# Altium PCB floppy_m0dule.PcbDoc
Units mil, origin at the board's own origin, x right, y up, seen from the top; angles counter-clockwise.
Board outline 1975 x 1975 mil, 2 copper layers (Top Layer, Bottom Layer); 42 components, 45 nets, 204 pads, 22 vias.
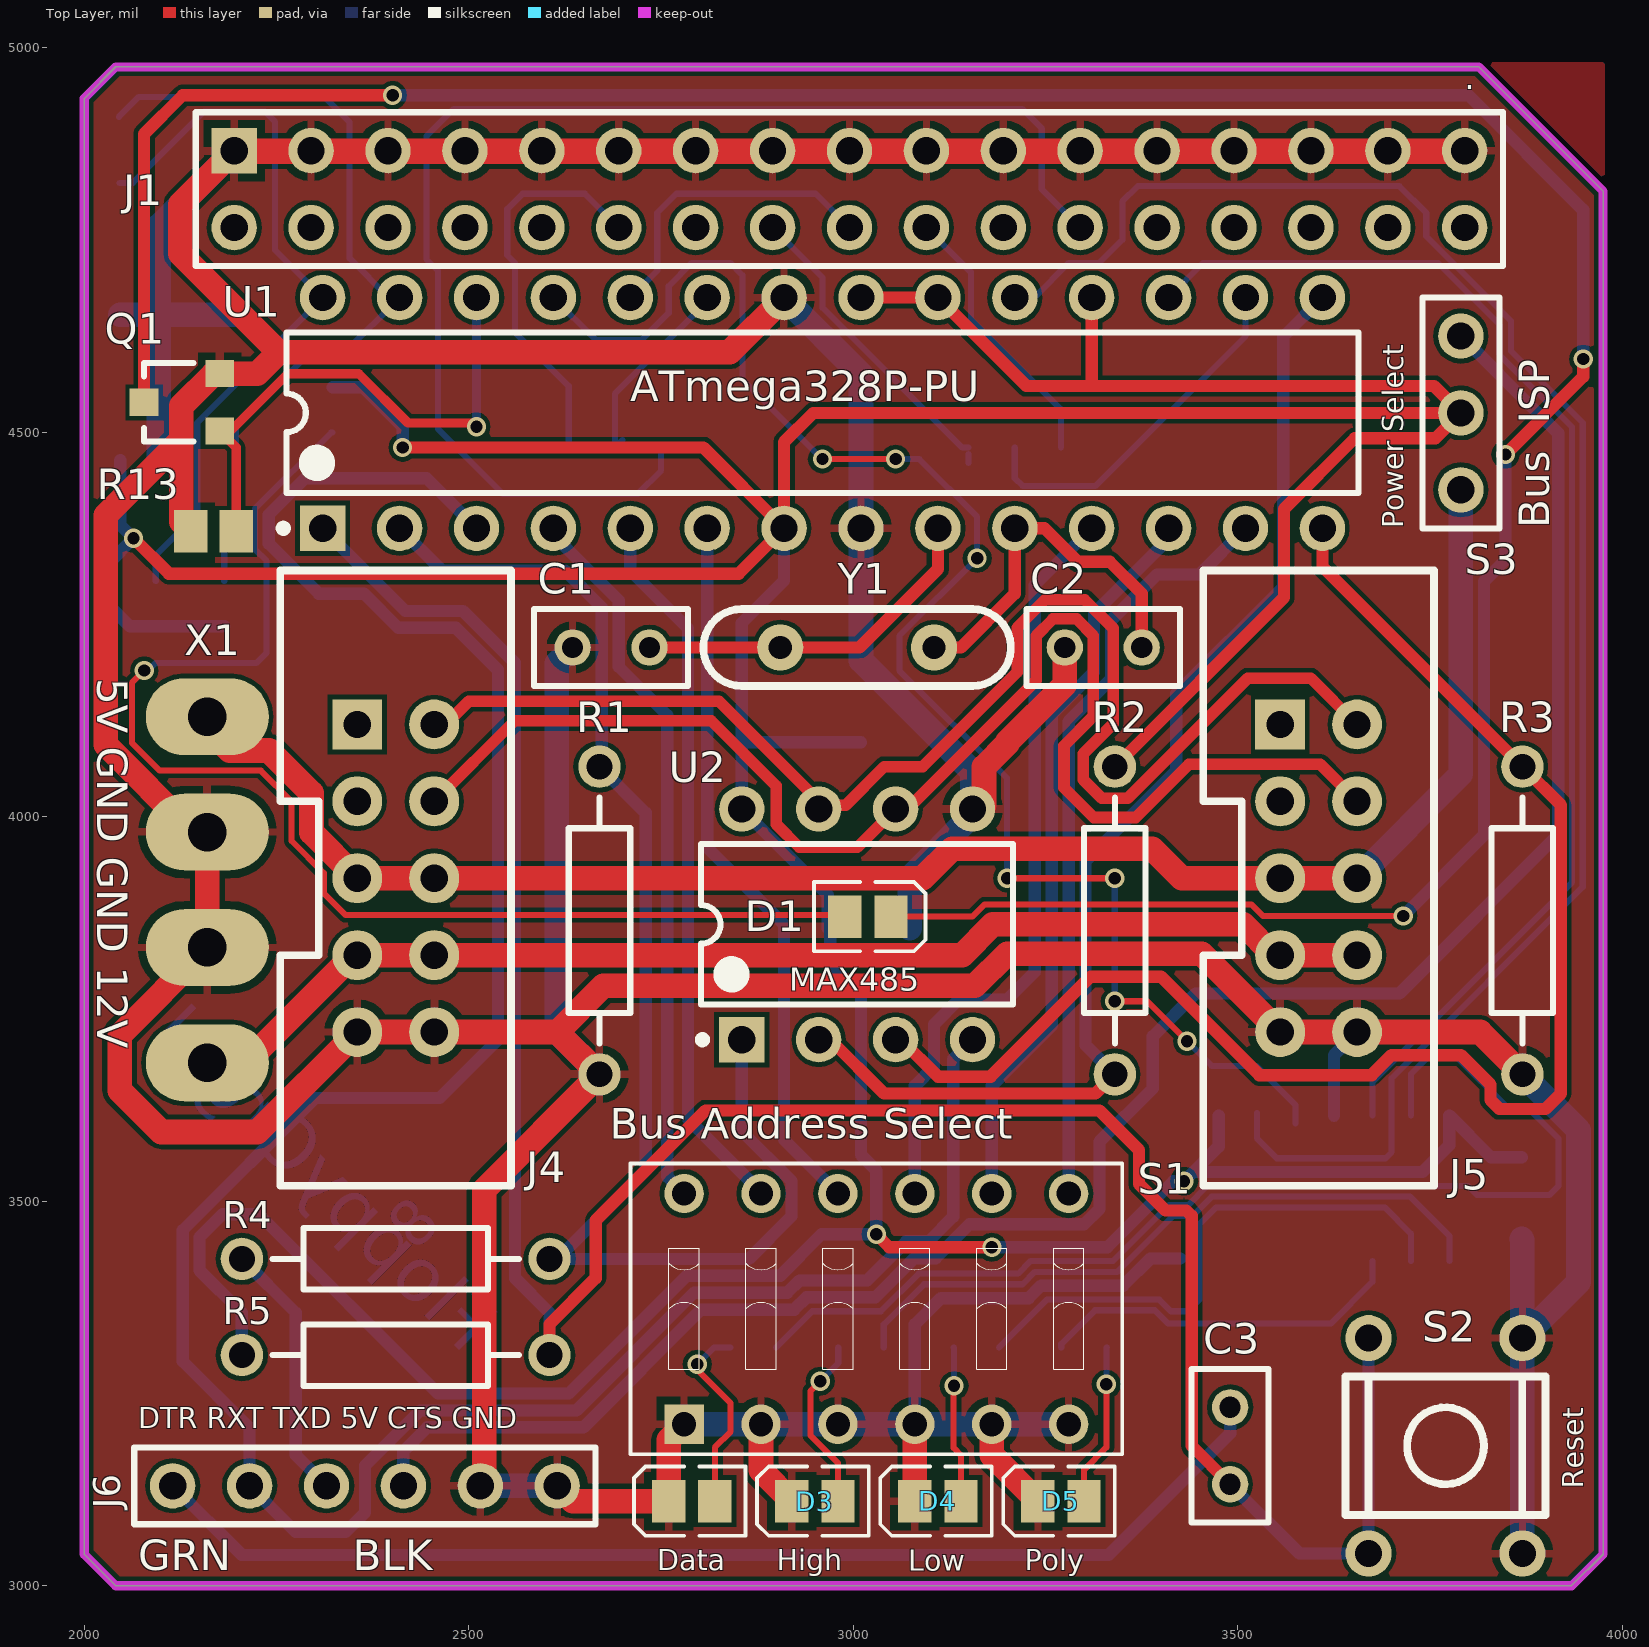
[diagram p0: Top Layer view]
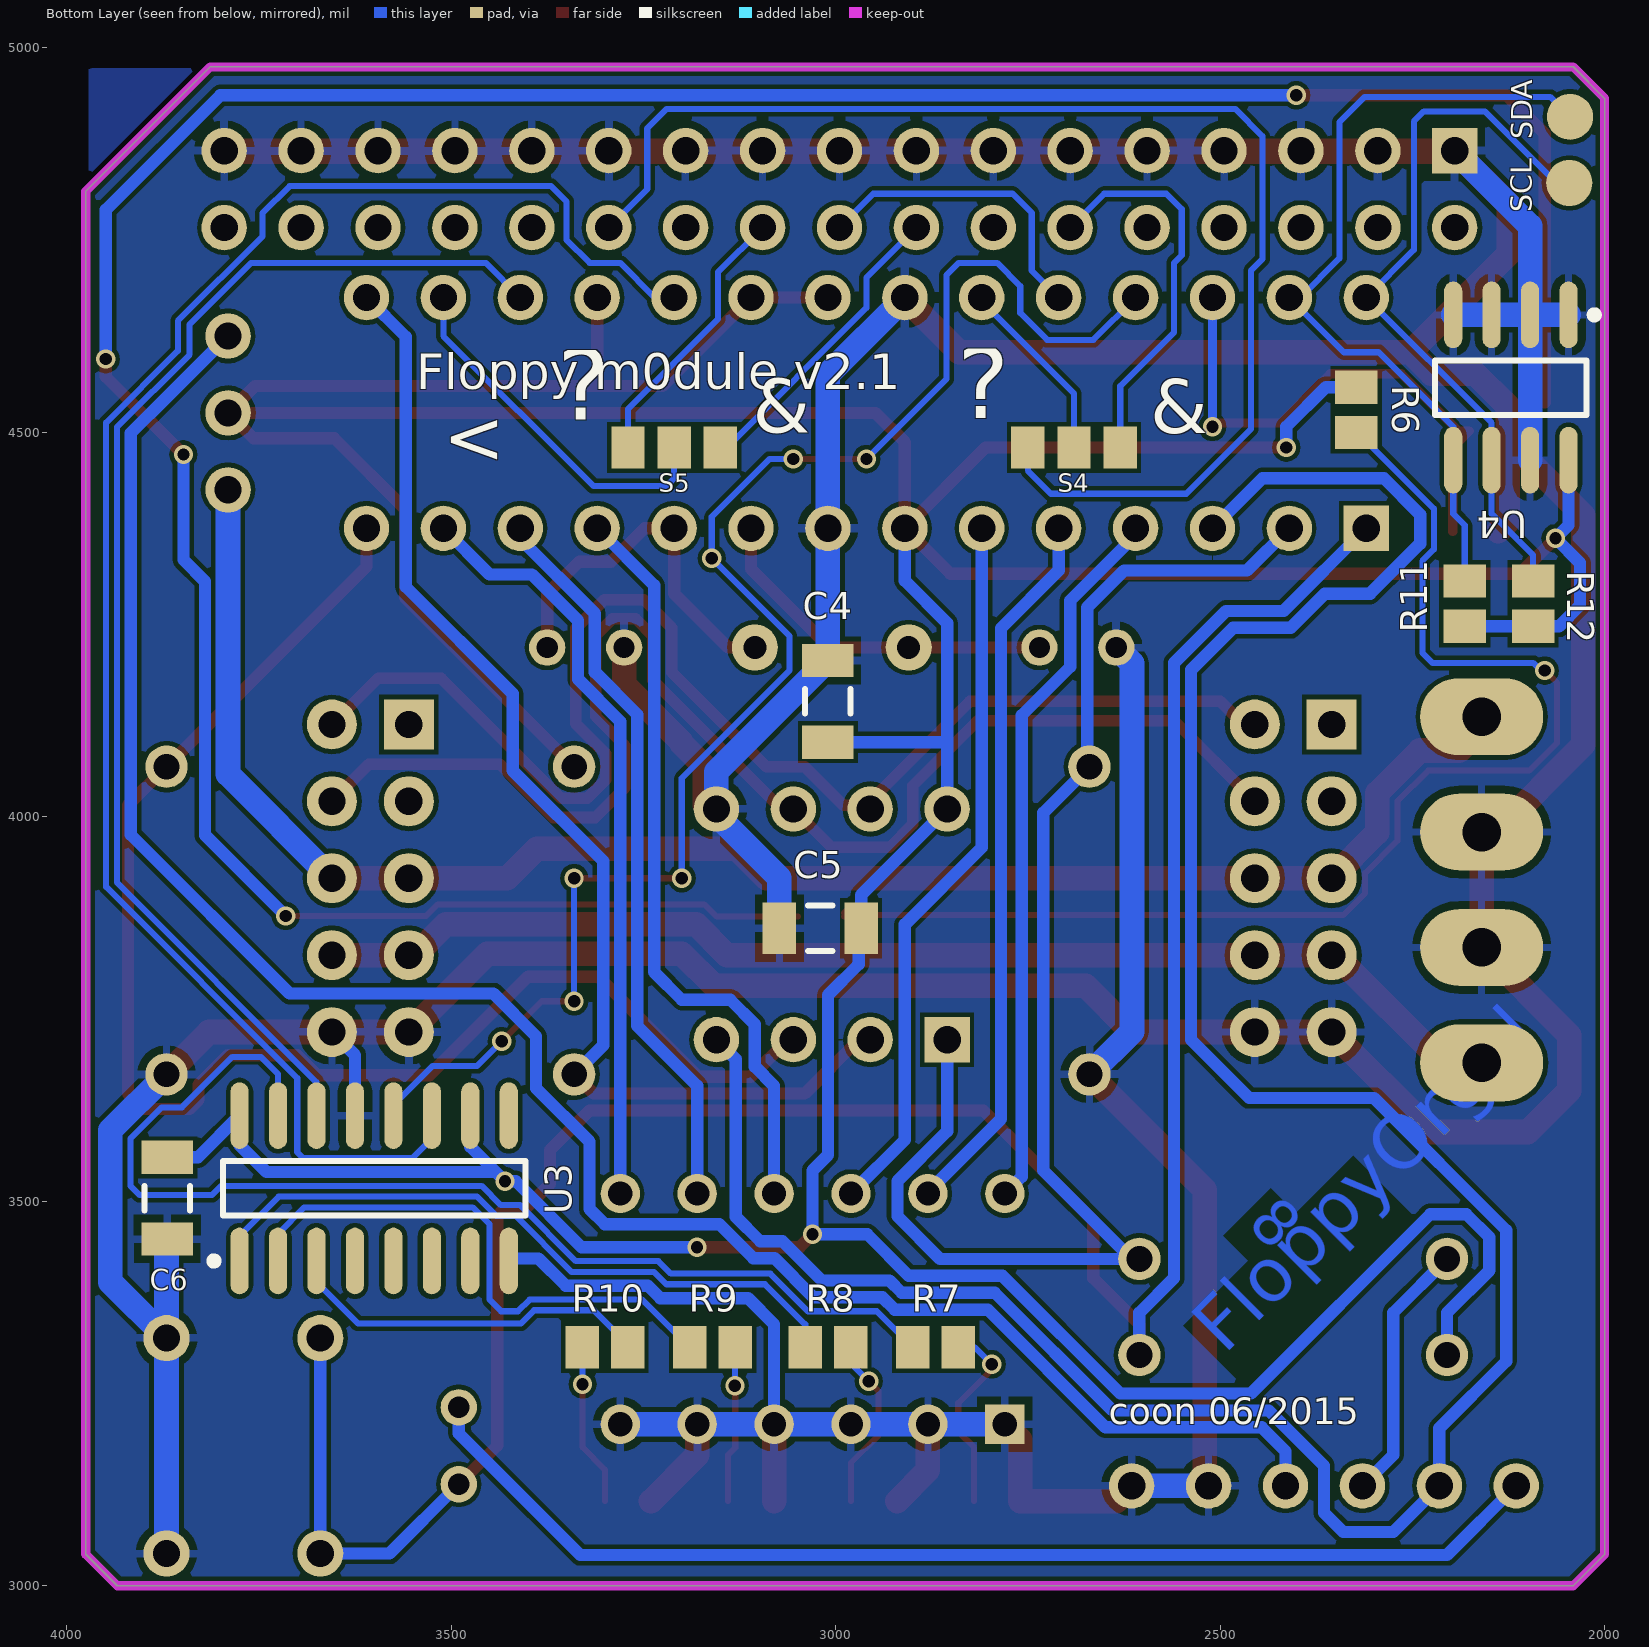
[diagram p1: Bottom Layer view, seen from below]
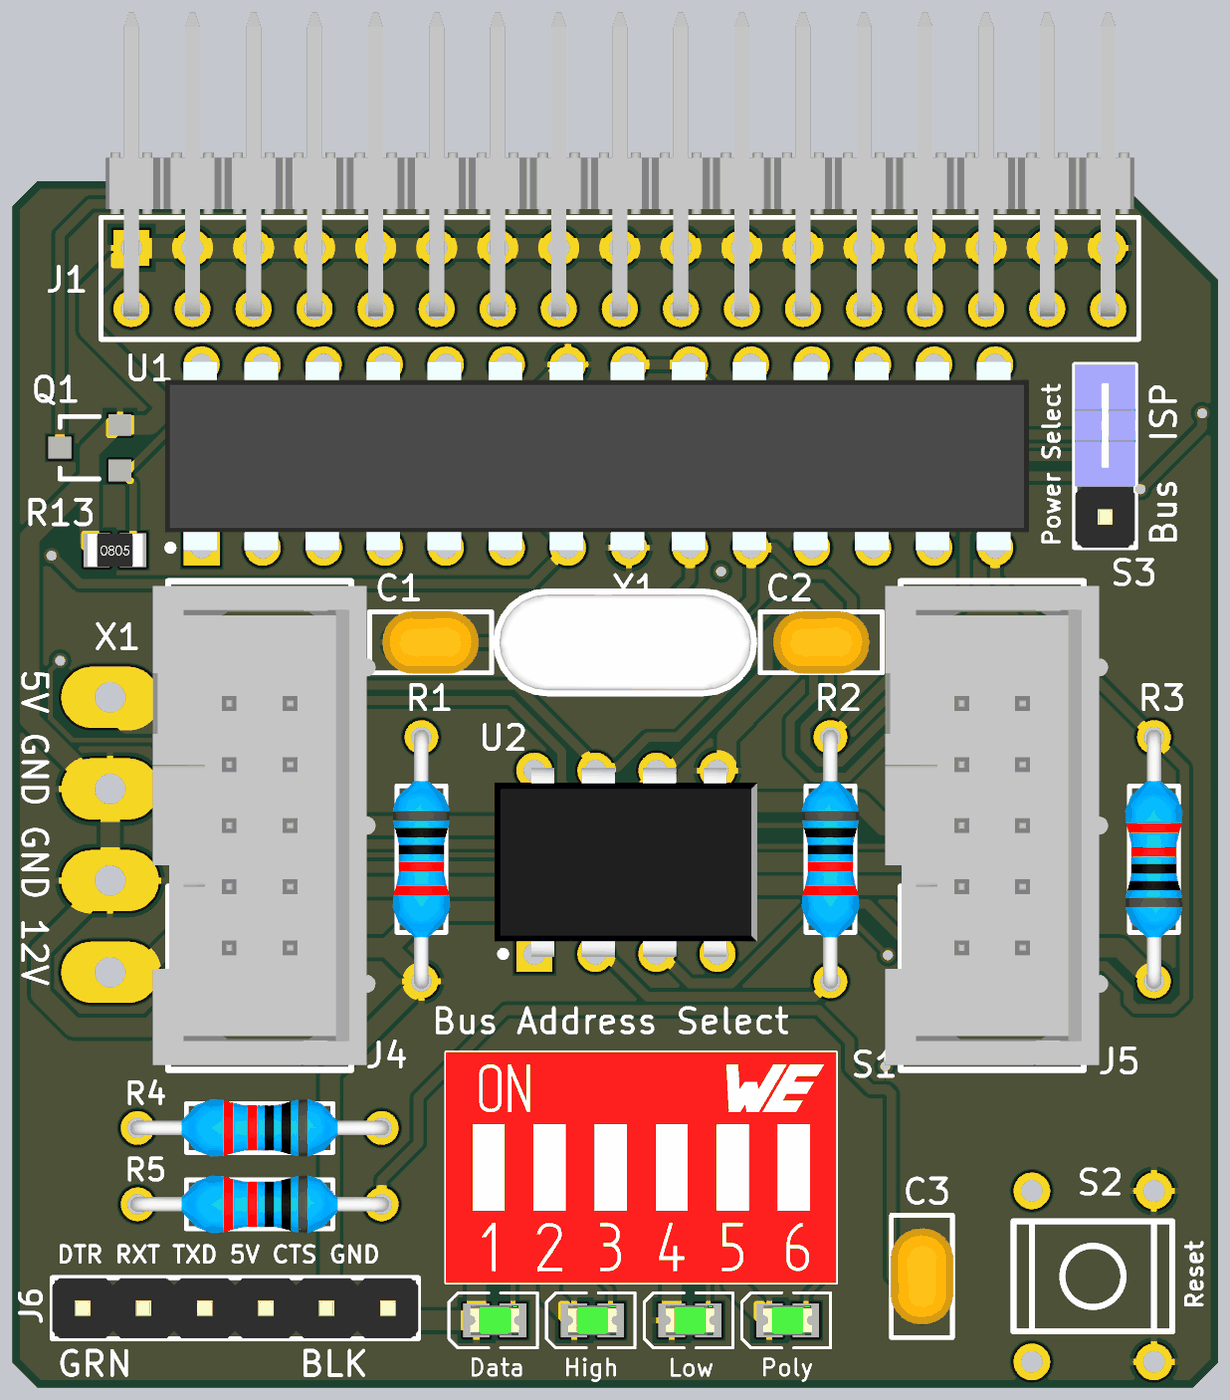
[diagram p2: 3D render of the assembled board from above, using the file's embedded part models]
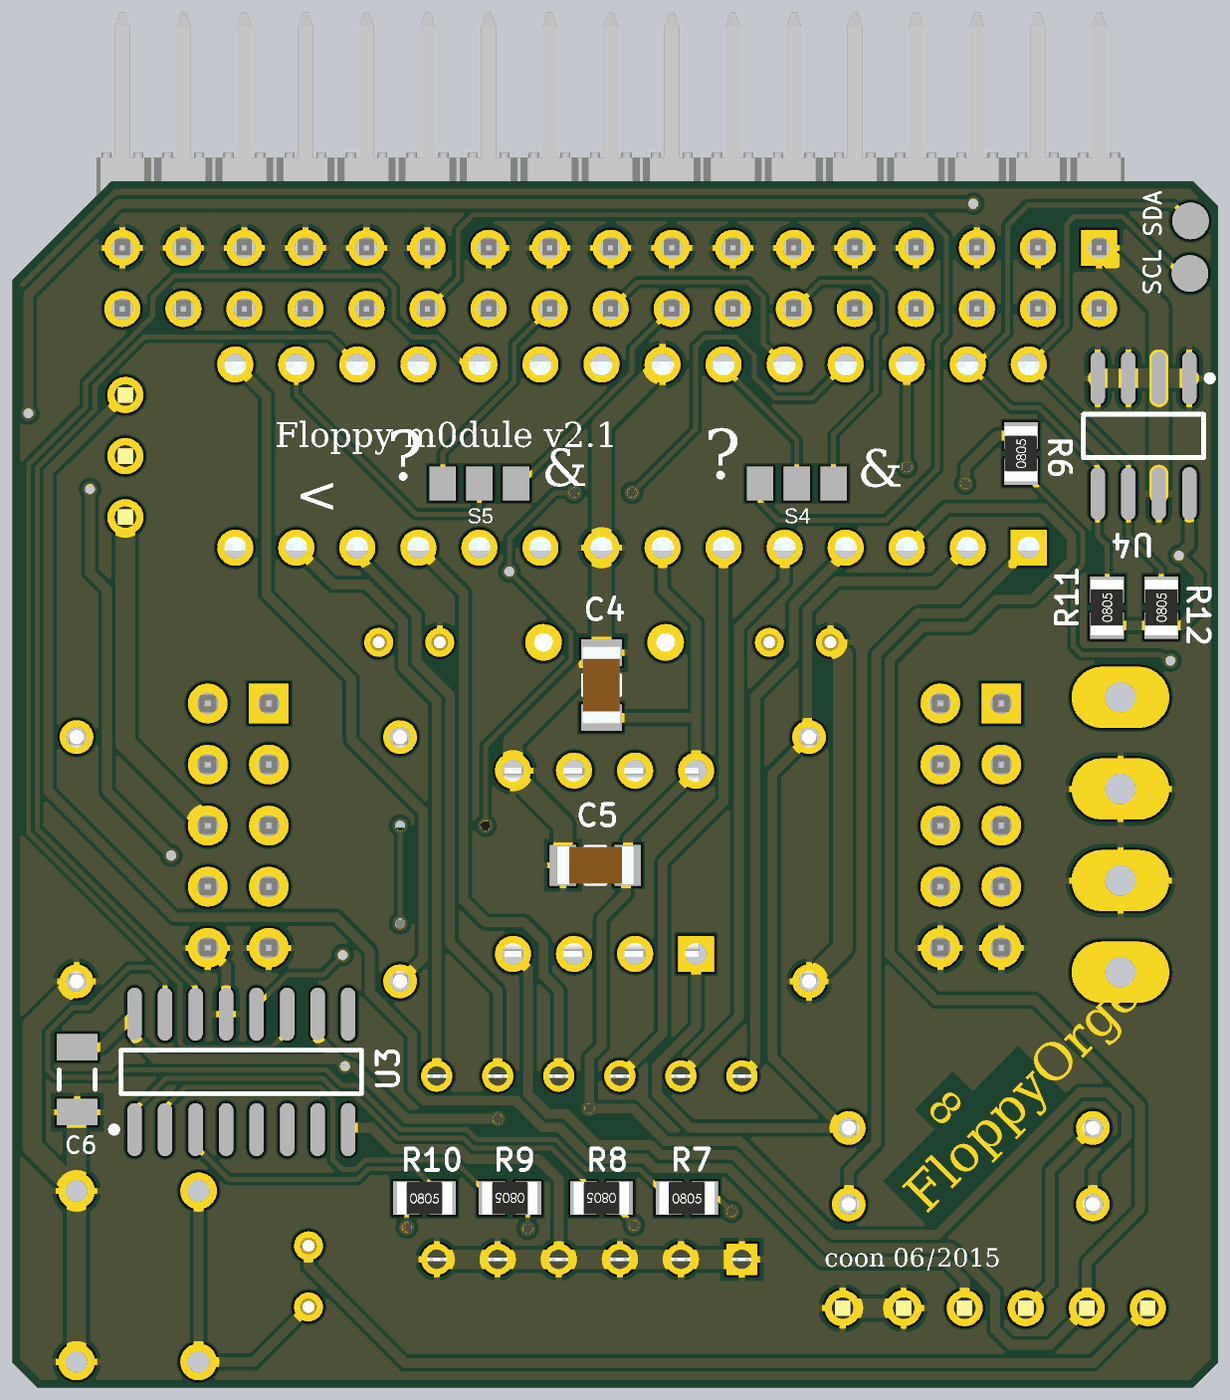
[diagram p3: 3D render of the assembled board from below, using the file's embedded part models]

## Layer stack, top to bottom
Top Solder: solder mask 0.4, Solder Resist, Dk 3.5
Top Layer: signal copper 1.4
Dielectric 1: dielectric 12.6, FR-4, Dk 4.8
Bottom Layer: signal copper 1.4
Bottom Solder: solder mask 0.4, Solder Resist, Dk 3.5

## Board outline
2041,3000 3934,3000 3975,3041 3975,4813 3813,4975 2041,4975 2000,4934 2000,3041

## Design rules (kind name [scope] priority, off if disabled: settings)
Clearance [All] p1: gap=6
DiffPairsRouting [All] p1: maxlimit=10 minlimit=10 mostfreqgap=10 toplayer_minwidth=15 toplayer_maxwidth=15 toplayer_prefwidth=15 bottomlayer_minwidth=15 bottomlayer_maxwidth=15 bottomlayer_prefwidth=15 maxuncoupledlength=500
HoleToHoleClearance [All] p1: gap=6 allowstackedmicrovias=TRUE
MinimumSolderMaskSliver [All] p1: minsoldermaskwidth=5.12
PolygonConnect [All] p1: connectstyle=Relief reliefconductorwidth=10 reliefentries=4 polygonreliefangle="90 Angle" airgapwidth=10
RoutingVias [All] p1: holewidth=11.81 width=25 viastyle="Through Hole" minholewidth=11.81 minwidth=25 maxholewidth=28 maxwidth=50
SilkToSolderMaskClearance [IsPad] p1: minsilkscreentomaskgap=7 clearancetoexposedcopper=TRUE
SolderMaskExpansion [All] p1: expansion=4
Width "Floppy Power Width" [InNetClass('Floppy Power')] p1: maxlimit=32 minlimit=16 preferedwidth=32
Width "Chip Power Width" [InNetClass('Chip Power')] p2: maxlimit=16 minlimit=16 preferedwidth=16 minimp=50.000000 maximp=50.000000 favimp=50.000000
Width [All] p3: maxlimit=24 minlimit=6 preferedwidth=16
25 further rules are at their usual default settings.

## Classes and differential pairs
net class "Chip Power": NetJ6_4 VCC
net class "Floppy Power": "BUS +5V" "BUS +12V" GND
differential pair RS485: +RS485_P -RS485_N

## Components (designator, comment, footprint, x,y, rotation, side; value= is the part's Value field where it differs from the comment)
C1 "Cap" RAD-0.1 2685,4220 r180 top
C2 "Cap" RAD-0.1 3325,4220 r180 top
C3 "PoR Cap" RAD-0.1 3490,3182 r270 top
C4 "Buffer Cap" C1206#1 3010,4150 r90 bottom
C5 "Buffer Cap" C1206#1 3020,3855 r0 bottom
C6 "Buffer Cap" C1206#2 3869,3504 r90 bottom
D1 "Under Chip (Blue)" "0805 LED" 3019,3870 r0 top
D3 "Tone too high (Red)" "0805 LED" 2950,3110 r180 top
D4 "Tone too low (Blue)" "0805 LED" 3110,3110 r180 top
D5 "Poly" "0805 LED" 3270,3110 r180 top
Data "Protocol Error (Orange)" "0805 LED" 2790,3110 r180 top
J1 "Shugart Floppy Connector" HDR2X17 3795,4866 r180 top
J4 "Floppy Bus Left" "SHROUDED PINHEADER 2X5" 2355,4120 r0 top
J5 "Floppy Bus Right" "SHROUDED PINHEADER 2X5" 3555,4120 r0 top
J6 "FTDI" HDR1X6 2115,3130 r0 top
Q1 "IRLML6344TRPbF" AO-SOT23-3_V 2127,4538.75 r90 top
R1 "Pulldown" AXIAL-0.4 2670,3865 r270 top
R2 "Pullup" AXIAL-0.4 3340,3865 r270 top
R3 "Pulldown" AXIAL-0.4 3870,3865 r90 top
R4 "Shortcut protection" AXIAL-0.4 2405,3425 r180 top
R5 "Pullup" AXIAL-0.4 2405,3300 r180 top
R6 "LED res" R0805 2323,4529 r90 bottom
R7 "LED res" R0805 2870,3310 r180 bottom
R8 "LED res" R0805 3010,3310 r0 bottom
R9 "LED res" R0805 3160,3310 r0 bottom
R10 "LED res" R0805 3300,3310 r180 bottom
R11 "Pullup" R0805 2182,4277 r90 bottom
R12 "Pullup" R0805 2093,4277 r90 bottom
R13 "Pulldown" R0805 2168,4371 r0 top
S1 "Bus Address Select" 418117170906 3030,3360 r0 top
S2 "SW-DPST" SWITCH 3770,3182 r180 top
S3 "Power Select Jumper" HDR1X3 3790,4425 r90 top
S4 "Drive Select Switch" "0805 SMD Switch Pads" 2660,4480 r0 bottom
S5 "Step Switch" "0805 SMD Switch Pads" 3240,4480 r180 bottom
SCL "Solder Pad" SOLDER_PAD 2046,4824 r90 bottom
SDA "Solder Pad" SOLDER_PAD 2045,4910 r90 bottom
U1 "ATmega328P-PU" 28P3 2960,4525 r90 top
U2 "MAX485" PA8 3005,3860 r90 top
U3 "M74HC595M1R" SO16_N 3600,3516.82 r90 bottom
U4 "AT24C01BN-SP25-B" 8S1_N 2122,4558 r270 bottom
X1 "Molex Connector" HDR1X4 2160,4080 r270 top
Y1 "20Mhz" CRYSTAL 3005,4220 r180 top

## Footprints (in the part's own frame and the unit in brackets; to place one, negate y for a bottom-side part, rotate by r counter-clockwise, add the part's x,y. Pads: shape width x height; smd on the part's side, far side on the other; paste and mask are expansions set on the pad)
8S1_N [mm] "SOIC, 8-Leads, Body 4.9x3.9mm, Pitch 1.27mm, IPC Medium Density"
  oval 2.2x0.6 smd: 1(-2.4,1.905) 2(-2.4,0.635) 3(-2.4,-0.635) 4(-2.4,-1.905) 5(2.4,-1.905) 6(2.4,-0.635) 7(2.4,0.635) 8(2.4,1.905)
  silkscreen extent -2.52,-2.5 0.9,2.88, body extent -2,-2.5 2,2.5, height 1.75
28P3 [mm] "DIP, 28-Leads, Row Spacing 7.62mm, Pitch 2.54mm, Body 34.67x7.3mm"
  rect 1.5x1.5 hole 0.9: 1(-3.81,16.51)
  round 1.5 hole 0.9: 2(-3.81,13.97) 3(-3.81,11.43) 4(-3.81,8.89) 5(-3.81,6.35) 6(-3.81,3.81) 7(-3.81,1.27) 8(-3.81,-1.27) 9(-3.81,-3.81) 10(-3.81,-6.35) 11(-3.81,-8.89) 12(-3.81,-11.43) 13(-3.81,-13.97) 14(-3.81,-16.51) 15(3.81,-16.51) 16(3.81,-13.97) 17(3.81,-11.43) 18(3.81,-8.89) 19(3.81,-6.35) 20(3.81,-3.81) 21(3.81,-1.27) 22(3.81,1.27) 23(3.81,3.81) 24(3.81,6.35) 25(3.81,8.89) 26(3.81,11.43) 27(3.81,13.97) 28(3.81,16.51)
  silkscreen extent -3.93,-17.7 2.65,17.93, body extent -3.94,-17.91 3.94,18.03, height 4.57
"0805 LED" [mm] "0805 SMD LED"
  rect 1.1x1.4 smd: 1(-0.762,0) 2(0.762,0)
  silkscreen extent -1.78,-1.14 1.91,1.14, body extent -1.01,-0.62 1.01,0.63, height 1.1
"0805 SMD Switch Pads" [mm] "0805 SMD switch pads"
  rect 1.1x1.4 smd: 1(-0.762,0) 2(0.762,0) 3(2.286,0)
418117170906 [mm] "06p, 2.54mm Pitch, Horizontal, Box Type, THT, flat Actuator, red, without Tape, Tube"
  rect 1.3x1.3 hole 0.8: 1(-6.35,-3.81)
  round 1.3 hole 0.8: 2(-3.81,-3.81) 3(-1.27,-3.81) 4(1.27,-3.81) 5(3.81,-3.81) 6(6.35,-3.81) 7(6.35,3.81) 8(3.81,3.81) 9(1.27,3.81) 10(-1.27,3.81) 11(-3.81,3.81) 12(-6.35,3.81)
  silkscreen extent -8.12,-4.8 8.12,4.8, body extent -8.12,-4.8 8.12,4.8, height 5.4
AO-SOT23-3_V [mm] "SOT23, 3-Leads, Body 3.016x2.8mm, Pitch 0.95mm"
  rect 0.9x0.95 smd: 1(-0.95,-1.25) 2(0.95,-1.25) 3(0,1.25)
  silkscreen extent -1.3,-0.38 1.3,1.25, body extent -1.14,-1.25 1.17,1.36, height 1.25
AXIAL-0.4 [mm] "Axial Device, Thru-Hole; 2 Leads; 0.4 in Pin Spacing"
  round 1.4 hole 0.85: 1(-5.08,0) 2(5.08,0)
  silkscreen extent -4.06,-1.02 4.06,1.02, body extent -5.38,-1.2 5.38,1.2, height 2.47
C1206#1 [mm] "Chip Capacitor, Body 3.2x1.6mm, IPC High Density"
  rect 1.1x1.7 smd: 1(1.35,0) 2(-1.35,0)
  silkscreen extent -0.4,-0.75 0.4,0.75, body extent -1.6,-0.8 1.6,0.8, height 1.6
C1206#2 [mm] "Chip Capacitor, Body 3.2x1.6mm, IPC High Density"
  rect 1.1x1.7 smd: 1(-1.35,0) 2(1.35,0)
  silkscreen extent -0.4,-0.75 0.4,0.75, body extent -1.7,-0.9 1.7,0.9, height 1.3
CRYSTAL [mil]
  round 60 hole 30: 1(-100,0) 2(100,0)
  silkscreen extent -200,-50 200,50, body extent -215,-88 217,88, height 142
HDR1X3 [mm] "Connector; Header; 3 Position"
  round 1.5 hole 0.9: 1(0,0) 2(2.54,0) 3(5.08,0)
  silkscreen extent -1.27,-1.27 6.35,1.27, body extent -1.27,-1.27 6.35,1.27, height 8.54
HDR1X4 [mil] "Connector; Header; 4 Position"
  oval 100x160 hole 50: 1(-50,0) 2(100,0) 3(250,0) 4(400,0)
HDR1X6 [mm] "Connector; Header; 6 Position"
  round 1.5 hole 0.9: 1(0,0) 2(2.54,0) 3(5.08,0) 4(7.62,0) 5(10.16,0) 6(12.7,0)
  silkscreen extent -1.27,-1.27 13.97,1.27, body extent -1.27,-1.24 13.97,1.25, height 8.54
HDR2X17 [mm] "Connector; Header; 17x2 Position"
  rect 1.5x1.5 hole 0.9: 1(40.64,0)
  round 1.5 hole 0.9: 2(40.64,2.54) 3(38.1,0) 4(38.1,2.54) 5(35.56,0) 6(35.56,2.54) 7(33.02,0) 8(33.02,2.54) 9(30.48,0) 10(30.48,2.54) 11(27.94,0) 12(27.94,2.54) 13(25.4,0) 14(25.4,2.54) 15(22.86,0) 16(22.86,2.54) 17(20.32,0) 18(20.32,2.54) 19(17.78,0) 20(17.78,2.54) 21(15.24,0) 22(15.24,2.54) 23(12.7,0) 24(12.7,2.54) 25(10.16,0) 26(10.16,2.54) 27(7.62,0) 28(7.62,2.54) 29(5.08,0) 30(5.08,2.54) 31(2.54,0) 32(2.54,2.54) 33(0,0) 34(0,2.54)
  silkscreen extent -1.27,-1.27 41.91,3.81, body extent -1.07,-9.78 41.71,2.85, height 5.79
PA8 [mm] "DIP, 8-Leads, Row Spacing 7.62mm, Pitch 2.54mm, Body 9.38x7.24mm"
  rect 1.5x1.5 hole 0.9: 1(-3.81,3.81)
  round 1.5 hole 0.9: 2(-3.81,1.27) 3(-3.81,-1.27) 4(-3.81,-3.81) 5(3.81,-3.81) 6(3.81,-1.27) 7(3.81,1.27) 8(3.81,3.81)
  silkscreen extent -3.93,-5.15 2.65,5.23, body extent -3.93,-5.46 3.94,5.46, height 5.08
R0805 [mm] "Chip Capacitor, Body 2.0x1.3mm, IPC High Density"
  rect 1.1x1.4 smd: 1(-0.75,0) 2(0.75,0)
  body extent -1.15,-0.67 1.15,0.68, height 0.76
RAD-0.1 [mm] "Radial Cap, Thru-Hole; 2 Leads; 0.1 in Pin Spacing"
  round 1.2 hole 0.7: 1(-1.27,0) 2(1.27,0)
  silkscreen extent -2.54,-1.27 2.54,1.27, body extent -2,-1.31 2,1.3, height 7.46
"SHROUDED PINHEADER 2X5" [mil] "2x5 Shrouded Pinheader"
  rect 65x65 hole 35.43: 1(0,0)
  round 65 hole 35.43: 2(100,0) 3(0,-100) 4(100,-100) 5(0,-200) 6(100,-200) 7(0,-300) 8(100,-300) 9(0,-400) 10(100,-400)
  silkscreen extent -100,-600 200,200, body extent -125,-592 240,192, height 367
SO16_N [mm] "SOIC, 16-Leads, Body 9.9x3.9mm, Pitch 1.27mm, IPC Medium Density"
  oval 2.2x0.6 smd: 1(-2.4,4.445) 2(-2.4,3.175) 3(-2.4,1.905) 4(-2.4,0.635) 5(-2.4,-0.635) 6(-2.4,-1.905) 7(-2.4,-3.175) 8(-2.4,-4.445) 9(2.4,-4.445) 10(2.4,-3.175) 11(2.4,-1.905) 12(2.4,-0.635) 13(2.4,0.635) 14(2.4,1.905) 15(2.4,3.175) 16(2.4,4.445)
  silkscreen extent -2.52,-5 0.9,5.42, body extent -1.95,-4.95 1.95,4.95, height 1.75
SOLDER_PAD [mil]
  round 60 smd: 1(0,0)
SWITCH [mil]
  round 60 hole 35.43: 1(100,-140) 2(-100,-140) 3(100,140) 4(-100,140)
  silkscreen extent -130,-90 130,90

## Part data
C1 C2: "Capacitor"
C3: library part Cap, "Capacitor"
C4 C5 C6: library part "Cap Semi", "Capacitor (Semiconductor SIM Model)"
D1 D3 D4 D5 Data: library part LED3, "Typical BLUE SiC LED"
J1: library part "Header 17X2", "Header, 17-Pin, Dual row"
J4 J5: library part "Floppy Bus Connector", "10 Pin Floppy bus connector for rainbow cable"
J6: library part "Header 6", "Header, 6-Pin"
Q1: library part CMP-0278-00001-1, "N-channel Enhancement Mode Field-Effect Transistor; 5.8A/30V"
R1 R2 R3 R4 R5 R11 R12 R13: library part Res2, "Resistor"
R6 R8 R9 R10: library part Res2, "Resistor for Blue LED 17.5mA @ 5V"
R7: library part Res2, "Resistor for Green LED 19.33mA @ 5V"
S1: library part "SW DIP-6", "Midi Channel Select"
S2: "Double-Pole, Single-Throw Switch"
S3: library part "Header 3H", "Header, 3-Pin, Right Angle"
S4 S5: library part "Header 3", "Header, 3-Pin"
U1: "8-bit AVR Microcontroller, 32KB Flash, 1KB EEPROM, 2KB SRAM, 28-pin PDIP, Industrial Grade (-40°C to 85°C)"
U2: library part MAX485EPA, "Low-Power, Slew-Rate-Limited RS-485/RS-422 Transceiver"
U3: "8 Bit Shift Register with Output Latches (3 STATE)"
U4: "1Kbit (128 x 8), 2-wire Bus Automotive Serial EEPROM with Write Protect, 2.5V, 8-Pin SOIC, Bulk"
X1: "Molex Power Supply Connector"
Y1: library part XTAL, "Crystal Oscillator"

## Via types
v1: diameter 25, hole 16, Top Layer to Bottom Layer, tented both sides, 22 vias

## Nets (pads, with @x,y where several pads share a name; then routed paths per layer and width w, separated by ;. In a path a pad name is that pad's centre, name@x,y a point inside that pad or via, vN(x,y) a via of type N, cw(c..) or ccw(c..) an arc to the next point about the centre after c; other vN are vias at no path point)
"3.5\" DS": J1.12 S4.1 | length 514.6
  Bottom Layer w8: S4.1 2630,4560 2560,4630 2560,4720 2550,4730 2550,4790 2570,4810 2651,4810 J1.12
"3.5\" STEP": J1.20 S5.1 | length 358.5
  Bottom Layer w8: J1.20 3153,4708 3153,4647 3270,4530 S5.1
"5.25\" DS": J1.24 S4.3 | length 1729
  Bottom Layer w8: S4.3 2750,4450 2720,4420 2544,4420 2460,4504 2460,4710 2445,4725 2445,4885 2480,4920 3220,4920 3245,4895 3245,4816 J1.24
"5.25\" STEP": J1.16 S5.3 | length 408.2
  Bottom Layer w8: J1.16 2960,4701 2960,4661.77 3141.77,4480 S5.3 ; S5.3@3150,4460 S5.3@3150,4471.77
"BUS +5V": J4.5 J4.6 J5.5 J5.6 S3.1 X1.1 | length 2212.7
  Top Layer w32: X1.1@2150,4125 2189,4086 2240.27,4086 2295.5,4030.77 2295.5,3979.5 J4.5 J4.6 3090,3920 3128.47,3958.47 3388.47,3958.47 3426.94,3920 J5.5 J5.6
  Bottom Layer w32: J5.6 3790,4055 S3.1
"BUS +12V": J4.7 J4.8 J5.7 J5.8 X1.4 | length 1586.1
  Top Layer w32: X1.4 2210,3680 2350,3820 J4.7 J4.8 3141.47,3820 3181.47,3860 3506.81,3860 3546.81,3820 J5.7 J5.8
DIP-1: S1.12 U1.4 | length 940.2
  Bottom Layer w16: U1.4@2600,4375 2601.11,4375 2695,4281.11 2695,4195 2758,4132 2758,3532 S1.12
DIP-2: S1.11 U1.5 | length 942.5
  Bottom Layer w16: U1.5@2700,4375 2700,4374.89 U1.5@2704.94,4369.94 ; U1.5 2710,4320 2785,4245 2785,3607 2880,3512 S1.11
DIP-3: S1.10 U1.6 | length 935.4
  Bottom Layer w16: U1.6 2810,3960 2910,3860 2910,3580 S1.10
DIP-4: S1.9 U1.11 | length 1004.2
  Bottom Layer w16: S1.9 3080,3650 3105,3675 3105,3730 3137,3762 3200,3762 3236,3798 3236,4301 U1.11 U1.11@3315,4380
DIP-5: S1.8 U1.12 | length 965.3
  Bottom Layer w16: S1.8 3180,3650 3258,3728 3258,4133 3313,4188 3313,4264.11 3410,4361.11 U1.12 ; U1.12@3400,4375 U1.12@3400,4380
DIP-6: S1.7 U1.13 | length 992.5
  Bottom Layer w16: S1.7 3280,4123.89 3335,4178.89 3335,4255 3395,4315 3450,4315 U1.13
GND: C1.2 C2.2 C4.1 C5.1 C6.1 D3.2 D4.2 D5.2 Data.2 J1.1 J1.3 J1.5 J1.7 J1.9 J1.11 J1.13 J1.15 J1.17 J1.19 J1.21 J1.23 J1.25 J1.27 J1.29 J1.31 J1.33 J4.9 J4.10 J5.9 J5.10 J6.5 J6.6 Q1.2 R1.2 R3.1 R13.1 S1.1 S1.2 S1.3 S1.4 S1.5 S1.6 S2.2 S2.4 U1.8 U1.22 U2.5 U3.8 U3.13 U4.1 U4.2 U4.3 U4.4 U4.7 X1.2 X1.3 | length 13266.6
  Top Layer w32: R13.1 2126,4383.47 2126,4490 ; J1.1@2195,4865 3795,4865 3794,4866 J1.31 J1.29 J1.27 J1.25 J1.23 J1.21 J1.19 J1.17 J1.15 J1.13 J1.11 J1.9 J1.7 J1.5 J1.3 J1.1 2125,4796 2125,4732 2253,4604 ; J6.5@2520,3130 2520,3515 R1.2 2615,3720 ; J6.6 2635,3110 Data.2 2760,3190 S1.1 ; S1.2 2880,3150 D3.2 ; U1.22 2839,4604 2253,4604 ; D4.2 S1.4 ; U2.5@3170,4015 3170,4065 3200.5,4095.5 3200.5,4097.22 3275,4171.72 C2.2 ; S1.5 3180,3170 D5.2 ; R3.1 3815,3720 J5.10 J5.9 3453,3822 3200,3822 3158,3780 2675,3780 2615,3720 ; 2126,4490 2126,4534 2168.15,4576.15 Q1.2 2225.15,4576.15 2253,4604 ; 2126,4490 2027.91,4391.91 2027.91,4093.32 2141.23,3980 X1.2 X1.3 2046,3716 2046,3644 2100,3590 2225,3590 J4.9 J4.10 2615,3720
  Bottom Layer w16: S1.4 3080,3340 3114.01,3374.01 3228.08,3374.01 3244.28,3390.2 3350.92,3390.2 3386.22,3425.51 U3.8@3425,3425.51 ; U3.13 3625,3690 J5.10
  Bottom Layer w32: U4.1 U4.2 ; U4.7 U4.2 ; J1.1 2097,4768 U4.2 ; U4.4 U4.3 U4.2 ; J6.5 J6.6@2610,3130 ; C1.2 2614.63,4199.63 2614.63,3720.37 R1.2 ; S1.1 S1.2 S1.3 S1.4 S1.5 S1.6 S1.6@3284,3210 ; U1.22 3010,4575 U1.8 C4.1 3155,4058.15 U2.5 3155,4002.7 3073.15,3920.85 C5.1 ; C6.1 3870,3449.85 S2.2 ; S2.4 S2.2 ; R3.1 3943,3592 3943,3395 S2.2
NetC1_1: C1.1 U1.9 Y1.2 | length 475.2
  Top Layer w16: C1.1@2730,4220 Y1.2 3008,4220 3110,4322 U1.9
NetC2_1: C2.1 U1.10 Y1.1 | length 489.2
  Top Layer w16: Y1.1 3140,4220 3210,4290 U1.10 3248.44,4375 3291.97,4331.47 3333.53,4331.47 3375,4290 C2.1
NetC3_1: C3.1 J6.1 | length 1517.4
  Bottom Layer w16: J6.1 2205,3040 3332,3040 3490,3198 C3.1 ; C3.1@3486,3236 C3.1@3490,3240
NetC3_2: C3.2 R5.1 S2.1 S2.3 U1.1 | length 3233.9
  Top Layer w16: R5.1 2605,3340 2665,3400 2665,3475 2808,3618 3320,3618 3371.5,3566.5 3371.5,3522.5 3406,3488 3433,3488 3440,3481 3440,3182 C3.2
  Bottom Layer w16: U1.1 2417.5,4267.5 2492.5,4267.5 2560,4200 2560,3400 2605,3355 R5.1 R5.1@2602.5,3302.5 ; C3.2 3580,3042 S2.3 S2.1 ; C3.2@3490,3140 C3.2@3494,3136
NetD1_1: D1.1 R6.1 | length 1674.4
  Top Layer w8: v1(2078,4190) 2062,4174 2062,4096 2098,4060 2229.5,4060 2269.5,4020 2269.5,3968.73 2311.5,3926.73 2311.5,3900.5 2340,3872 2987,3872 D1.1 ; D1.1@2986.5,3877.5 D1.1@2989,3875
  Bottom Layer w8: v1(2078,4190) 2083,4190 2093,4200 2224,4200 2237,4213 2237,4332.54 2222,4347.54 2222,4400.46 2321.02,4499.47 R6.1
NetD1_2: D1.2 Q1.3 | length 3996.5
  Top Layer w8: D1.2 3154.7,3870 3170.7,3886 3517.58,3886 3532.58,3871 v1(3715,3871)
  Top Layer w16: Q1.3 2077.79,4887.79 2128,4938 v1(2401,4938) ; v1(3848,4471) 3949,4572 v1(3949,4595)
  Bottom Layer w16: v1(2401,4938) 3800,4938 3949,4789 v1(3949,4595) ; v1(3715,3871) 3820,3976 3820,4306 3848,4334 v1(3848,4471)
NetD3_1: D3.1 R8.1 | length 229.7
  Top Layer w8: v1(2957,3266) 2944.41,3253.41 2944.41,3195.26 2980,3159.67 D3.1
  Bottom Layer w8: v1(2957,3266) 2980.47,3289.47 R8.1
NetD4_1: D4.1 R9.1 | length 204.4
  Top Layer w8: v1(3131,3260) 3130.47,3259.47 3130.47,3179.53 3140,3170 D4.1
  Bottom Layer w8: R9.1 3131,3309.47 v1(3131,3260)
NetD5_1: D5.1 R10.1 | length 212.2
  Top Layer w8: D5.1 3300,3151.05 3329,3180.05 v1(3329,3262)
  Bottom Layer w8: v1(3329,3262) 3329,3309.47 R10.1
NetData_1: Data.1 R7.2 | length 257.1
  Top Layer w8: v1(2797,3288) 2797,3281 2840.47,3237.53 2840.47,3200.47 2820,3180 Data.1
  Bottom Layer w8: v1(2797,3288) 2819,3310 R7.2
NetJ1_18: J1.18 U1.24 | length 403.1
  Bottom Layer w8: U1.24 2745,4710 2745,4785 2770,4810 2951,4810 J1.18
NetJ6_2: J6.2 U1.3 U2.4 | length 3493.9
  Top Layer w16: J6.2 J6.2@2230,3130
  Bottom Layer w16: U1.3 2445,4440 2287,4440 2240,4393 2240,4355 2305,4290 2363.89,4290 2408.39,4245.5 2483.39,4245.5 2538,4190.89 2538,3710 2462.23,3634.23 2300,3634.23 2128,3462.23 2128,3292 2215,3205 J6.2 2275,3070 2340,3070 2365,3095 2365,3156.11 2436.89,3228 2640,3228 2793,3381 2913.96,3381 2929.96,3397 3018,3397 3069,3448 3098,3448 3130,3480 3130,3685 U2.4 ; U2.4@3163.06,3701.94 3170,3708.89 U2.4@3170,3710
NetJ6_3: J6.3 R4.2 | length 340.6
  Bottom Layer w16: R4.2 2275,3355 2275,3170 J6.3
NetJ6_4: J6.4 S3.3 | length 2670.5
  Bottom Layer w16: J6.4 2415,3175 2446,3206 2649.11,3206 2802.11,3359 2923.07,3359 2939.07,3375 3028.54,3375 3079.54,3426 3107.11,3426 3151.11,3470 3300,3470 3320,3490 3320,3577.49 3389.51,3647 3389.51,3714.51 3445,3770 3710,3770 3916.5,3976.5 3916.5,4498.96 3891.73,4523.73 3891.27,4523.73 S3.3
NetQ1_1: Q1.1 R13.2 U1.26 | length 700.5
  Top Layer w12: R13.2 2197.53,4480.03 Q1.1 2189.94,4501.35 2264.6,4576 2357,4576 2421,4512 2505,4512 v1(2510,4507)
  Bottom Layer w12: v1(2510,4507) U1.26
NetR1_1: R1.1 R4.1 U1.2 U2.1 | length 1817.5
  Bottom Layer w16: U1.2 2465,4320 2625,4320 2673,4272 2673,4077 R1.1@2675.38,4074.62 ; R4.1 R4.1@2615,3425 ; R4.1@2610,3420 R4.1@2615,3425 ; R1.1 2730,4005 2730,3540 R4.1@2615,3425 ; U2.1 2855,3590.99 2919.59,3526.4 2919.59,3480.41 2864.18,3425 R4.1@2615,3425
NetR2_2: R2.2 U1.15 U2.2 | length 1566.2
  Top Layer w16: U2.2@2970,3710 3040,3640 3315,3640 R2.2
  Bottom Layer w16: R2.2@3340,3660 R2.2@3342.5,3662.5 ; R2.2 3302,3703 3302,3942 3420,4060 3420,4160 3559,4299 3559,4624 U1.15
NetR3_2: R3.2 U1.14 U2.3 | length 1919.9
  Top Layer w16: U2.3 3062,3710 3110,3662 3178.56,3662 3308.56,3792 3400,3792 3528,3664 3674,3664 3700,3690 3790,3690 3828.44,3651.56 3828.44,3631.56 3840,3620 3900,3620 3920,3640 3920,4015 R3.2 3610,4325 U1.14
  Bottom Layer w16: R3.2@3880,4060 R3.2@3880,4065
NetR7_1: R7.1 U3.15 | length 1475
  Bottom Layer w8: R7.1 2946.53,3357 3036,3357 3085.01,3406.01 3214.2,3406.01 3230.39,3422.2 3337.66,3422.2 3410.33,3494.87 3435.27,3494.87 3460.37,3519.97 3799.03,3519.97 3811,3508 3905,3508 3917,3520 3917,3581.23 3876.23,3622 3850,3622 3784.3,3687.7 3747.3,3687.7 3725,3665.4 U3.15
NetR8_2: R8.2 U3.1 | length 888
  Bottom Layer w8: R8.2 3039.53,3340 3040,3340 3092.01,3392.01 3220,3392.01 3236.19,3408.2 3343.46,3408.2 3416.13,3480.87 3441.07,3480.87 3466.17,3505.97 3724.03,3505.97 3775,3455 U3.1
NetR9_2: R9.2 U3.2 | length 730.6
  Bottom Layer w8: R9.2 3251.73,3372.2 3397.8,3372.2 3413,3357 3435,3357 3450,3372 3450,3470 3471.97,3491.97 3691.03,3491.97 3725,3458 U3.2
NetR10_2: R10.2 U3.3 | length 483.8
  Bottom Layer w8: R10.2 3270.47,3314.3 3314.38,3358.2 3392,3358.2 3409.2,3341 3621,3341 3675,3395 U3.3
NetR11_2: R11.2 SDA.1 U1.27 U4.5 | length 1076.8
  Bottom Layer w8: SDA.1 2071,4936 2312,4936 2345,4903 2345,4726 2396,4675 U1.27 2339,4604 2294,4604 2197,4507 U4.5 2197,4394 2182,4379 R11.2
NetR12_2: R12.2 SCL.1 U1.28 U4.6 | length 958.9
  Bottom Layer w8: SCL.1 2063,4824 2156,4917 2235,4917 2248,4904 2248,4737 U1.28 2147,4512 U4.6 2147,4394 2093,4340 R12.2
NetS4_2: S4.2 U1.23 | length 258.8
  Bottom Layer w8: S4.2@2700,4490 S4.2 2690,4550 2810,4670 U1.23
NetS5_2: S5.2 U1.16 | length 474.9
  Bottom Layer w8: S5.2 3210,4440 3220,4430 3315,4430 3510,4625 U1.16
NetU1_17: U1.17 U3.14 | length 1657.1
  Bottom Layer w8: U1.17 3455,4720 3760,4720 3840,4640 3840,4600.91 3934.5,4506.41 3934.5,3914.5 3675,3655 U3.14
NetU1_19: U1.19 U3.11 | length 2269
  Bottom Layer w8: U1.19 3235,4675 3280,4720 3320,4720 3350,4750 3350,4800 3370,4820 3710,4820 3745,4785 3745,4754.8 3855.13,4644.67 3855.13,4605.58 3948.5,4512.21 3948.5,3908.7 3700,3660.2 3700,3563.97 3692,3555.97 3550.53,3555.97 3525,3581.5 U3.11 U3.11@3525,3614.49
NetU1_25: U1.25 U3.12 | length 2036
  Top Layer w8: v1(2959.9,4465) v1(3055,4465) ; v1(3200,3920) v1(3340,3920) ; v1(3340,3760) 3382,3760 v1(3434,3708)
  Bottom Layer w8: U1.25 2665,4620 2725,4620 2760,4655 2760,4690 2790,4720 2840,4720 2855.9,4704.1 2855.9,4569 v1(2959.9,4465) ; v1(3055,4465) 3086,4465 3161,4390 v1(3161,4336) 3060,4235 3060,4189.92 3200,4049.92 v1(3200,3920) ; v1(3340,3760) v1(3340,3920) ; v1(3434,3708) 3466.12,3675.88 3524.12,3675.88 3575,3625 U3.12@3575,3601.31
RS485_N: J4.2 J5.2 U2.7 | length 1803.8
  Top Layer w15: J4.2 2470,4120 2500,4150 2825.36,4150 U2.7@2955,4020.36 ; U2.7 U2.7@2955,4020.36 ; J5.2 3595,4180 3513.07,4180 3357.01,4023.94 3322.99,4023.94 3298.94,4047.99 3298.94,4082.01 3337.88,4120.94 3337.88,4244.98 3300.73,4282.12 3249.27,4282.12 3212.88,4245.73 3212.88,4187.88 3090,4065 3040,4065 2990,4015 2970,4015 2955,4030 U2.7@2955,4020.36
RS485_P: J4.4 J5.4 U2.6 | length 1806.3
  Top Layer w15: J4.4 2560,4125 2815,4125 2900,4040 2900,3990 2930,3960 3005,3960 U2.6 ; U2.6@3070,4015 3075.36,4015 3237.88,4177.52 3237.88,4235.38 3259.62,4257.12 3290.38,4257.12 3312.12,4235.38 3312.12,4130.54 3273.94,4092.36 3273.94,4037.64 3312.64,3998.94 3367.36,3998.94 3436.42,4068 3607,4068 J5.4
VCC: C4.2 C5.2 C6.2 R2.1 R5.2 R6.2 R11.1 R12.1 S3.2 U1.7 U1.18 U1.20 U1.21 U2.8 U3.10 U3.16 U4.8 | length 8077.1
  Top Layer w16: v1(2064,4362) 2110,4316 2851,4316 U1.7 ; v1(2414,4480) 2805,4480 U1.7 ; U1.21 U1.20 3225,4560 3310,4560 ; v1(3030,3457) 3046.8,3440.2 v1(3180.2,3440.2) ; U1.18 3310,4560 ; R2.1 3560,4285 3560,4400 3652,4492 3757,4492 S3.2 ; U1.7 2910,4487 2948,4525 S3.2 ; 3310,4560 3755,4560 S3.2
  Bottom Layer w16: U4.8 2047,4379 v1(2064,4362) 2032,4330 2032,4275 2059.53,4247.47 R12.1 R11.1 ; R5.2 2205,3355 2150,3410 2150,3453.12 2180,3483.12 2226.88,3483.12 2460,3250 2630,3250 2783,3403 2904.85,3403 2958.85,3457 v1(3030,3457) 3030,3540 3010,3560 3010,3768.15 2970,3808.15 ; R6.2 2362.47,4558.53 2414,4507 v1(2414,4480) ; U1.7 2910,4306.76 2855,4251.76 2855,4096.85 ; C5.2 2966.85,3898.15 U2.8 2855,4096.85 ; C5.2@2970,3855 2970,3810 2970.92,3809.08 ; C4.2 2855,4096.85 ; v1(3180.2,3440.2) 3330.2,3440.2 3416,3526 v1(3430,3526) 3441.97,3537.97 ; U3.10 3475,3571 3441.97,3537.97 ; C6.2 3829.16,3557.15 U3.16 3775,3572.93 3740.03,3537.97 3441.97,3537.97
pads on no net: J1.2 J1.4 J1.6 J1.8 J1.10 J1.14 J1.22 J1.26 J1.28 J1.30 J1.32 J1.34 J4.1 J4.3 J5.1 J5.3 U3.4 U3.5 U3.6 U3.7 U3.9

## Polygon pours and split planes (outlines as drawn)
GND on Top Layer "Bottom Overlay-No Net" (solid, pour order 4): 1999,4981 3974.22,4981 3977,4978.14 3977,2997.86 2001.78,2997.86 1999,2995
GND on Bottom Layer "Bottom Overlay-No Net" (solid, pour order 6): 3971.15,4977 3967.46,4973.2 2001,4973.2 2001,3002.9 2002.85,3001 2004.69,3002.9 3973,3002.9

## Keep-outs
Keep-Out Layer:
  the board outline again, w11.81

## Other copper
Bottom Layer:
  text "8" at 2480,3456 h100 r45
  text "FloppyOrgel" at 2478,3283 h120 r315

## Silkscreen, mask and mechanical layers (free items; w line width, h text height)
Top Overlay:
  text "." at 3795,4946 h30
  text "Power Select" at 3715,4375 h27 r90
  text "Bus  ISP" at 3905,4375 h40 r90
  text "5V GND GND 12V" at 2017,4180 h40 r270
  text "DTR RXT TXD 5V CTS GND" at 2070,3205 h27
  text "Reset" at 3949,3126 h27 r90
  text "GRN         BLK" at 2070,3020 h40
  text "High" at 2900.27,3020 h27
  text "Low" at 3071.51,3019.5 h27
Bottom Overlay:
  text "Floppy m0dule v2.1" at 3545,4540 h80
  text "?" at 2842,4488 h160
  text "?" at 3362,4486 h160
  text "&" at 3108,4476 h120
  text "&" at 2591,4475 h120
  text "<" at 3510,4436 h120
  text "coon 06/2015" at 2645,3198 h59.06
Bottom Solder:
  text "8" at 2480,3456 h100 r45
  text "FloppyOrgel" at 2478,3283 h120 r315

## Dimensions
2000,3000 to 2000,4975 on Mechanical 1
2000,3000 to 3975,3000 on Mechanical 1